# EAGLE board Plug-In_Pet_Infinite (EAGLE 9.6.2)
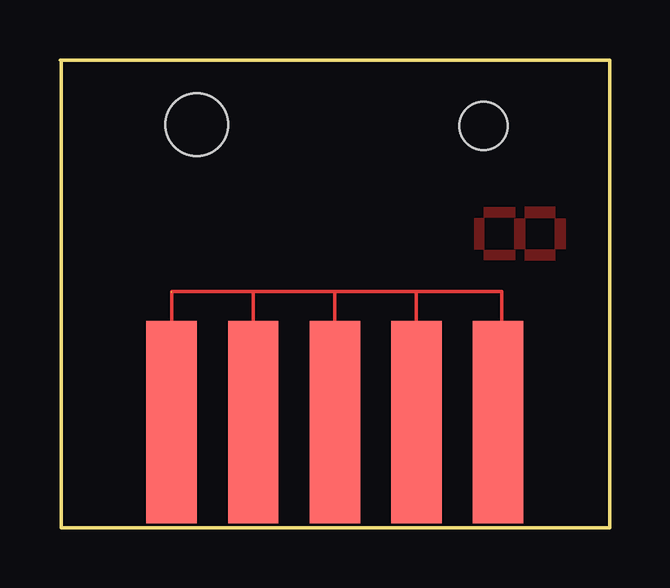
[diagram p0: board, top side]

Size 22.9 x 19.5 mm. Coordinates in mm from the lower left corner, seen from the top.
Outline: 0.05,19.5 0.05,0 22.9,0 22.9,19.5 0,19.5
Copper layers (1*16): Top 0.035mm / dielectric 1.5mm / Bottom 0.035mm
Design rules "default": minimum track width 6mil, minimum drill 0.35mm, track to track 6mil, track to pad 6mil, pad to pad 6mil, via to via 6mil, smd to smd 6mil, copper to edge 40mil, drill to drill 6mil, minimum pad ring 10mil, minimum via ring 8mil, stop-mask expansion 4mil, vias tented up to drill 0mil, thermal gap 10mil
Holes 2.6 mm at 5.7,16.8
Holes 2 mm at 17.65,16.75

## Footprints (pad centres in the part's own frame; a part is rotated, then mirrored left to right if it is on the bottom)
PLUGINPET = smd 2.1 x 8.45: P$1 0,0; P$2 3.4,0; P$3 6.8,0; P$4 10.2,0; P$5 13.6,0

## Placement (x,y rotation side)
U$1  PLUGINPET  [PLUGINPET]  4.65,4.4 0 top

## Library data of the parts
U$1 = Plug-In Pet

## Nets
N$2: U$1.P$1 U$1.P$2 U$1.P$3 U$1.P$4 U$1.P$5

## Tracks (layer width: path | path; a pad name or v marks a point on that pad's centre or on a via)
N$1
  pour Top: 21.05,11.62 20.62,11.62 20.62,12.89 21.05,12.89
N$2  (1 unrouted)
  Top 0.152: U$1.P$1 4.65,9.8 | 4.65,9.85 8.05,9.85 | 8.05,9.85 11.45,9.85 | 11.45,9.85 14.8,9.85 | 14.8,9.85 18.4,9.85 18.4,8.7 | 18.4,8.7 18.4,8.3 18.25,8.15 | U$1.P$4 14.85,9.8 14.8,9.85 | U$1.P$3 11.45,9.85 | U$1.P$2 8.05,9.85 | U$1.P$5 18.4,8.7
N$3
  pour Top: 19.36,13.35 19.36,12.93 20.62,12.93 20.62,13.35
N$4
  pour Top: 19.36,11.58 19.36,11.15 20.62,11.15 20.62,11.58
N$5
  pour Top: 19.36,11.62 18.94,11.62 18.94,12.89 19.36,12.89
N$6
  pour Top: 18.94,12.93 17.67,12.93 17.67,13.35 18.94,13.35
N$7
  pour Top: 18.94,11.15 17.67,11.15 17.67,11.58 18.94,11.58
N$8
  pour Top: 17.25,12.89 17.25,11.62 17.67,11.62 17.67,12.89